# Altium PCB PCB1.PcbDoc (part 10 of 10)
Units mm, origin at the board's own origin, x right, y up, seen from the top; angles counter-clockwise.
Board outline 171.83 x 244.04 mm, 2 copper layers (Top Layer, Bottom Layer); 100 components, 186 nets, 878 pads, 221 vias.
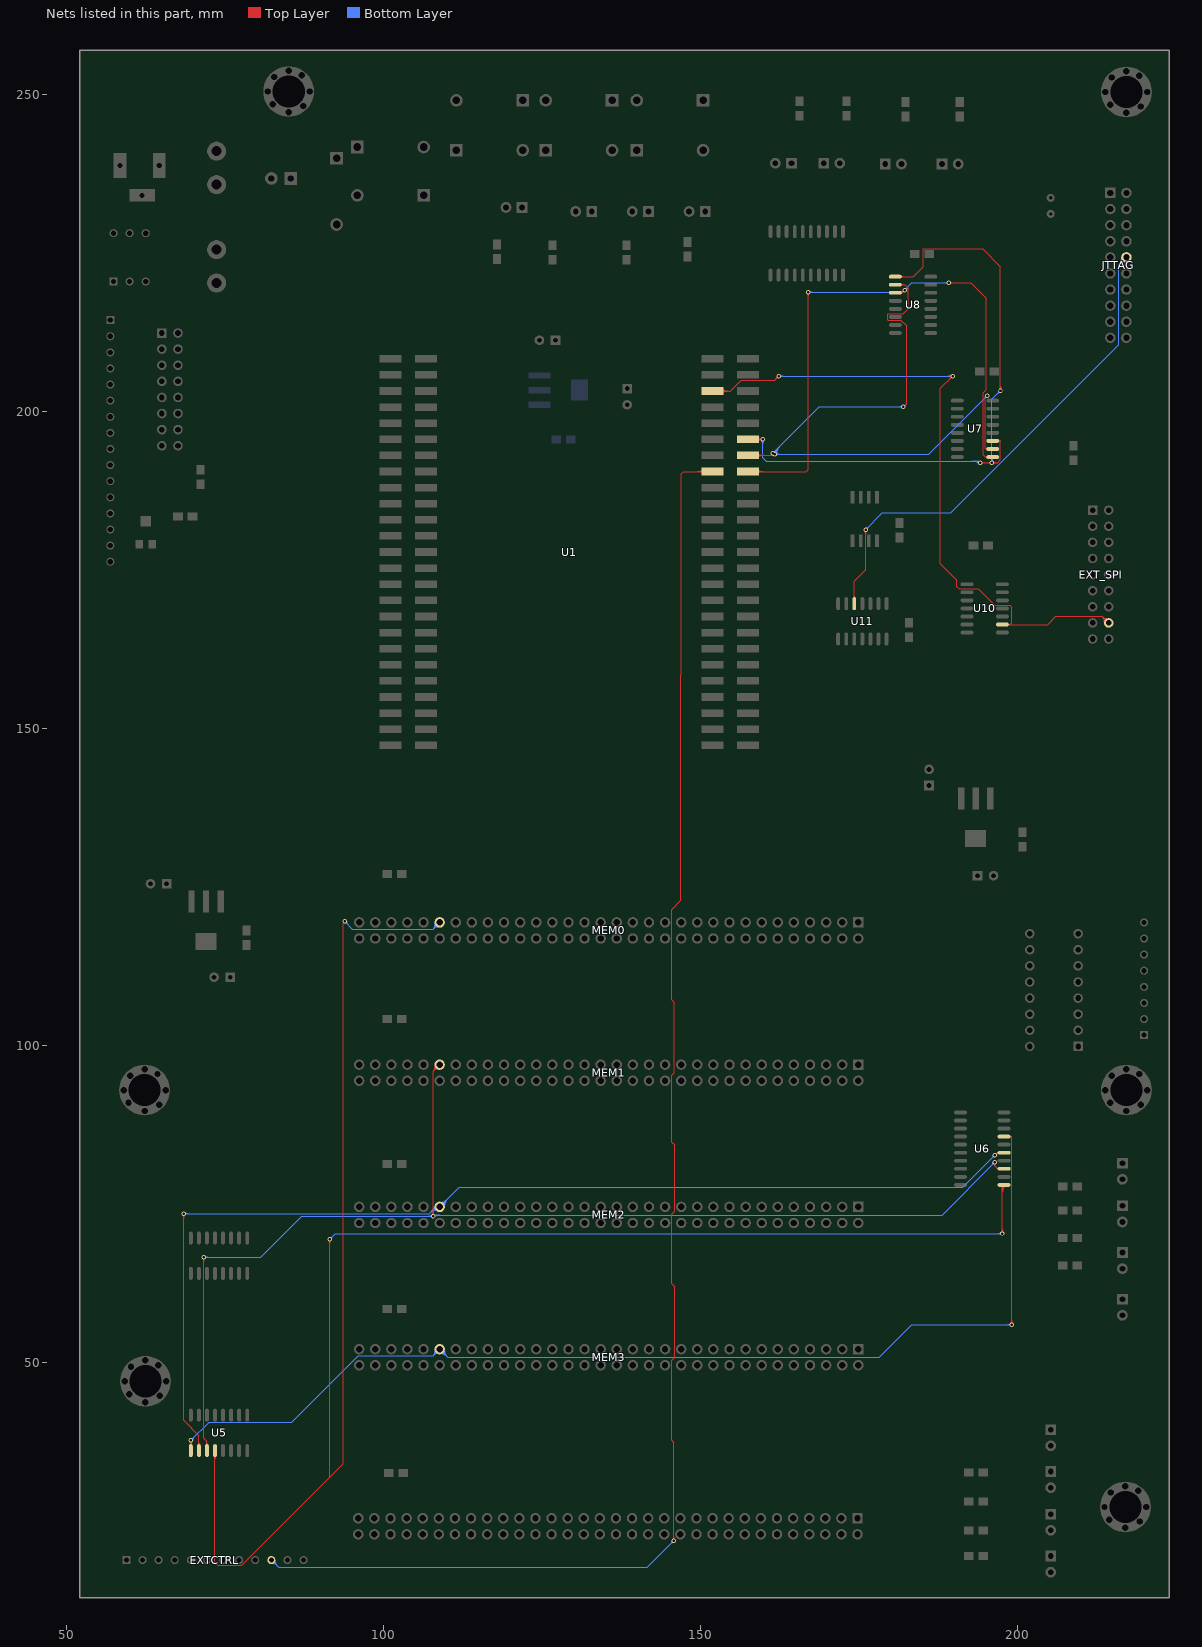
[diagram p10: the nets of this part, all layers, seen from the top]

## Via types
v1: diameter 0.7, hole 0.4, Top Layer to Bottom Layer, 221 vias

## Nets (pads, with @x,y where several pads share a name; then routed paths per layer and width w, separated by ;. In a path a pad name is that pad's centre, name@x,y a point inside that pad or via, vN(x,y) a via of type N, cw(c..) or ccw(c..) an arc to the next point about the centre after c; other vN are vias at no path point) (continued)
RDY0: MEM0.53 U5.4 U6.11 | length 311.6
  Top Layer w0.152: U5.4@73.244,35.195 cw(c72.854,34.805) 73.406,34.805 cw(c73.958,34.805) U5.4@73.568,35.195 ; U5.4@73.406,36.068 73.406,18.415 73.863,17.958 77.597,17.958 91.491,31.852 ; v1@91.297,69.225 cw(c90.83,68.757) 91.491,68.757 cw(c92.152,68.757) v1@91.684,69.225 ; v1(91.491,69.418) 91.491,31.852 ; v1(93.878,119.532) 93.624,119.278 93.624,33.985 91.491,31.852 ; v1@197.418,70.501 ccw(c196.951,70.968) 197.612,70.968 ccw(c198.273,70.968) v1@197.806,70.501 ; v1(197.612,70.307) 197.612,77.978 U6.11@197.866,77.978 ; 197.612,76.813 cw(c199.031,76.813) U6.11@198.028,77.816 ; 197.612,77.181 cw(c198.663,77.181) U6.11@197.92,77.924 ; 197.612,77.549 cw(c198.295,77.549) U6.11@197.812,78.032
  Bottom Layer w0.152: v1(91.491,69.418) 92.38,70.307 v1(197.612,70.307) ; v1@91.491,69.692 ccw(c91.491,70.353) 91.958,69.886 ccw(c92.426,69.418) v1@91.765,69.418 ; v1@93.878,119.259 cw(c93.878,118.598) 94.346,119.065 cw(c94.813,119.532) v1@94.152,119.532 ; v1(93.878,119.532) 95.072,118.339 107.798,118.339 ; MEM0.53@108.099,119.264 cw(c107.038,119.098) 107.798,118.339 ; MEM0.53@108.25,119.288 cw(c107.405,119.155) 108.01,118.551 cw(c108.614,117.946) MEM0.53@108.747,118.791 ; MEM0.53@108.4,119.311 cw(c107.771,119.213) 108.222,118.763 cw(c108.672,118.312) MEM0.53@108.77,118.941 ; MEM0.53@108.723,118.64 ccw(c108.557,117.579) 107.798,118.339 ; MEM0.53@108.839,119.38 107.798,118.339 ; v1@197.418,70.114 ccw(c196.951,69.646) 196.951,70.307 ccw(c196.951,70.968) v1@197.418,70.501
RDY1: MEM1.53 U5.3 U6.13 | length 203.3
  Top Layer w0.152: v1@71.434,66.38 cw(c70.967,65.912) 71.628,65.912 cw(c72.289,65.912) v1@71.822,66.38 ; v1(71.628,66.573) 71.628,38.024 72.136,37.516 U5.3@72.136,36.068 ; U5.3@71.974,36.941 ccw(c71.584,37.331) 72.136,37.331 ccw(c72.688,37.331) U5.3@72.298,36.941 ; v1@107.604,73.244 ccw(c107.137,73.711) 107.798,73.711 ccw(c108.459,73.711) v1@107.991,73.244 ; v1(107.798,73.05) 107.798,95.902 ; MEM1.53@108.099,96.827 cw(c107.038,96.661) 107.798,95.902 ; MEM1.53@108.25,96.851 cw(c107.405,96.719) 108.01,96.114 cw(c108.614,95.509) MEM1.53@108.747,96.354 ; MEM1.53@108.4,96.875 cw(c107.771,96.776) 108.222,96.326 cw(c108.672,95.876) MEM1.53@108.77,96.505 ; MEM1.53@108.723,96.204 ccw(c108.557,95.143) 107.798,95.902 ; MEM1.53@108.839,96.943 107.798,95.902 ; v1@196.221,81.321 cw(c195.933,80.963) 196.393,80.963 ; v1(196.393,81.534) 196.393,80.962 ; 196.552,80.804 ccw(c196.858,81.111) U6.13@197.053,80.722 ; v1@196.564,81.321 ccw(c196.852,80.963) 196.393,80.963 ; 196.701,80.654 ccw(c196.958,80.911) U6.13@197.121,80.586 ; U6.13@196.938,80.446 ccw(c196.837,80.412) 196.837,80.518 ; U6.13@196.938,80.59 cw(c196.837,80.624) 196.837,80.518 ; U6.13@197.866,80.518 196.837,80.518 ; 196.393,80.962 196.837,80.518
  Bottom Layer w0.152: v1(71.628,66.573) 80.594,66.573 87.071,73.05 v1(107.798,73.05) 107.975,73.228 188.087,73.228 v1(196.393,81.534) ; v1@71.822,66.38 cw(c72.289,65.912) 72.289,66.573 cw(c72.289,67.234) v1@71.822,66.767 ; v1@107.604,72.857 ccw(c107.137,72.389) 107.137,73.05 ccw(c107.137,73.711) v1@107.604,73.244 ; v1@107.776,73.072 cw(c108.152,72.696) 108.152,73.228 ; v1@107.883,72.965 cw(c108.52,72.328) 108.52,73.228 ; v1@107.991,72.857 cw(c108.888,71.96) 108.888,73.228 ; v1@196.119,81.534 cw(c195.458,81.534) 195.925,81.067 cw(c196.393,80.599) v1@196.393,81.26
RDY2: MEM2.53 U5.2 U6.15 | length 192.8
  Top Layer w0.152: v1@68.259,73.263 cw(c67.792,72.796) 68.453,72.796 cw(c69.114,72.796) v1@68.647,73.263 ; v1(68.453,73.457) 68.453,40.851 70.866,38.438 U5.2@70.866,36.068 ; U5.2@70.704,36.941 ccw(c70.314,37.331) 70.866,37.331 ccw(c71.418,37.331) U5.2@71.028,36.941 ; v1(196.418,82.652) 196.825,83.058 ; v1@196.447,82.924 ccw(c196.495,83.388) 196.825,83.058 ; v1@196.496,82.729 cw(c197.108,82.117) U6.15@197.151,82.982 ; v1@196.66,82.893 cw(c196.828,82.724) U6.15@196.995,82.895 ; v1@196.691,82.68 cw(c197.154,82.728) 196.825,83.058 ; 196.739,82.972 cw(c197.131,82.58) U6.15@197.159,83.134 ; 196.768,83.002 cw(c196.936,82.834) U6.15@197.101,83.004 ; U6.15@196.941,82.978 ccw(c196.825,82.934) 196.825,83.058 ; U6.15@196.941,83.138 cw(c196.825,83.182) 196.825,83.058 ; U6.15@197.866,83.058 196.825,83.058
  Bottom Layer w0.152: v1(68.453,73.457) 107.213,73.457 108.026,74.27 108.026,74.507 MEM2.53@108.839,74.507 111.929,77.597 191.364,77.597 v1(196.418,82.652) ; v1@68.647,73.263 cw(c69.114,72.796) 69.114,73.457 cw(c69.114,74.118) v1@68.647,73.65 ; 107.14,73.383 cw(c108.476,72.047) MEM2.53@108.752,73.917 ; 107.354,73.598 cw(c108.531,72.421) MEM2.53@108.774,74.067 ; 107.569,73.812 cw(c108.586,72.794) MEM2.53@108.796,74.218 ; 107.783,74.026 cw(c108.642,73.168) MEM2.53@108.819,74.369 ; 107.968,74.211 ccw(c107.672,74.507) MEM2.53@108.09,74.507 ; 107.997,74.241 cw(c108.697,73.541) MEM2.53@108.841,74.52 ; MEM2.53@108.839,74.951 ccw(c108.839,76.023) 109.597,75.265 ccw(c110.355,74.507) MEM2.53@109.283,74.507 ; MEM2.53@108.839,75.103 ccw(c108.839,76.543) 109.857,75.525 ccw(c110.875,74.507) MEM2.53@109.435,74.507 ; MEM2.53@108.839,75.255 ccw(c108.839,77.063) 110.117,75.785 ccw(c111.396,74.507) MEM2.53@109.588,74.507 ; v1@196.144,82.652 cw(c195.483,82.652) 195.951,82.184 cw(c196.418,81.717) v1@196.418,82.378
RDY3: MEM3.53 U5.1 U6.17 | length 187.8
  Top Layer w0.152: v1@69.402,37.479 cw(c68.935,37.012) 69.596,37.012 cw(c70.257,37.012) v1@69.79,37.479 ; U5.1@69.434,36.941 ccw(c69.044,37.331) 69.596,37.331 ccw(c70.148,37.331) U5.1@69.758,36.941 ; U5.1@69.596,36.068 v1(69.596,37.673) ; U6.17@197.866,85.598 199.06,85.598 ; U6.17@198.754,85.453 cw(c199.06,85.203) 199.06,85.598 ; U6.17@198.754,85.743 ccw(c199.06,85.993) 199.06,85.598 ; v1@198.892,56.124 ccw(c198.424,56.592) 199.085,56.592 ccw(c199.746,56.592) v1@199.279,56.124 ; v1(199.085,55.931) 199.085,85.573 199.06,85.598
  Bottom Layer w0.152: v1(69.596,37.673) 72.487,40.564 85.522,40.564 95.987,51.029 107.798,51.029 ; v1@69.596,37.947 ccw(c69.596,38.608) 70.063,38.14 ccw(c70.531,37.673) v1@69.87,37.673 ; MEM3.53@108.099,51.954 cw(c107.038,51.788) 107.798,51.029 ; MEM3.53@108.25,51.978 cw(c107.405,51.845) 108.01,51.241 cw(c108.614,50.636) MEM3.53@108.747,51.481 ; MEM3.53@108.4,52.001 cw(c107.771,51.903) 108.222,51.453 cw(c108.672,51.002) MEM3.53@108.77,51.631 ; MEM3.53@108.723,51.33 ccw(c108.557,50.269) 107.798,51.029 ; MEM3.53@108.842,51.474 cw(c108.848,50.056) 109.85,51.059 cw(c110.853,52.061) MEM3.53@109.435,52.067 ; MEM3.53@108.841,51.626 cw(c108.846,50.571) 109.592,51.317 cw(c110.338,52.063) MEM3.53@109.283,52.068 ; MEM3.53@108.842,51.321 cw(c108.851,49.542) 110.109,50.8 ; MEM3.53@109.588,52.067 ccw(c111.367,52.058) 110.109,50.8 ; v1@198.892,55.737 ccw(c198.424,55.27) 198.424,55.931 ccw(c198.424,56.592) v1@198.892,56.124 ; v1(199.085,55.931) 183.312,55.931 178.181,50.8 110.109,50.8 ; 107.798,51.029 MEM3.53@108.839,52.07 110.109,50.8
RESR0: EXTCTRL.10 U1.15 | length 250.1
  Top Layer w0.152: v1@145.577,22.012 ccw(c145.11,22.48) 145.771,22.48 ccw(c146.432,22.48) v1@145.964,22.012 ; v1(145.771,21.819) 145.771,37.338 145.44,37.668 145.44,50.343 145.898,50.8 145.898,61.951 145.44,62.408 145.44,73.366 145.898,73.824 145.898,84.277 145.44,84.734 145.44,95.25 145.872,95.682 145.872,106.731 145.44,107.163 145.44,121.375 146.906,122.842 146.906,158.375 146.99,158.458 146.99,190.183 147.307,190.5 U1.15@151.892,190.5 ; U1.15@150.372,190.13 ccw(c149.477,189.235) 149.477,190.5 ccw(c149.477,191.765) U1.15@150.372,190.87 ; U1.15@150.479,190.237 ccw(c149.845,189.603) 149.845,190.5 ccw(c149.845,191.397) U1.15@150.479,190.763
  Bottom Layer w0.152: EXTCTRL.10@82.296,18.237 cw(c82.296,16.888) 83.25,17.842 cw(c84.204,18.796) EXTCTRL.10@82.855,18.796 ; EXTCTRL.10@82.296,18.39 cw(c82.296,17.408) 82.99,18.102 cw(c83.684,18.796) EXTCTRL.10@82.702,18.796 ; EXTCTRL.10@82.296,18.796 83.439,17.653 141.605,17.653 v1(145.771,21.819) ; v1@145.497,21.819 cw(c144.836,21.819) 145.303,21.351 cw(c145.771,20.884) v1@145.771,21.545
SCK: EXT_SPI.16 U1.5 U10.9 | length 118.1
  Top Layer w0.152: U1.5@151.892,203.2 154.686,203.2 156.413,204.927 161.722,204.927 v1(162.357,205.562) ; U1.5@153.305,202.937 cw(c153.939,202.303) 153.939,203.2 cw(c153.939,204.097) U1.5@153.305,203.463 ; U1.5@153.412,202.83 cw(c154.307,201.935) 154.307,203.2 cw(c154.307,204.465) U1.5@153.412,203.57 ; v1@162.083,205.562 cw(c161.422,205.562) 161.889,205.095 cw(c162.357,204.627) v1@162.357,205.288 ; v1@189.49,205.562 cw(c188.829,205.562) 189.296,205.095 cw(c189.763,204.627) v1@189.763,205.288 ; v1(189.763,205.562) 187.833,203.632 187.833,175.986 190.436,173.383 190.436,172.364 190.817,171.983 193.802,171.983 196.367,169.418 198.806,169.418 199.111,169.113 199.111,166.675 198.806,166.37 ; U10.9@197.612,166.37 198.806,166.37 ; U10.9@198.5,166.225 cw(c198.806,165.975) 198.806,166.37 ; U10.9@198.5,166.515 ccw(c198.806,166.765) 198.806,166.37 ; EXT_SPI.16@213.703,166.661 ccw(c212.353,166.735) 213.309,167.691 ; EXT_SPI.16@213.855,166.653 ccw(c212.811,166.71) 213.551,167.449 ccw(c214.29,168.189) EXT_SPI.16@214.347,167.145 ; EXT_SPI.16@214.008,166.644 ccw(c213.268,166.685) 213.792,167.208 ccw(c214.315,167.732) EXT_SPI.16@214.356,166.992 ; EXT_SPI.16@214.339,167.297 cw(c214.265,168.647) 213.309,167.691 ; EXT_SPI.16@214.376,166.624 213.309,167.691 ; 198.806,166.37 204.724,166.37 206.045,167.691 213.309,167.691
  Bottom Layer w0.152: v1(162.357,205.562) v1(189.763,205.562) ; v1@162.55,205.369 cw(c163.018,204.901) 163.018,205.562 cw(c163.018,206.223) v1@162.55,205.756 ; v1@189.57,205.369 ccw(c189.102,204.901) 189.102,205.562 ccw(c189.102,206.223) v1@189.57,205.756
SCK_JTTAG: JTTAG.10 U11.5 | length 87.8
  Top Layer w0.152: U11.5@174.082,170.545 ccw(c173.692,170.935) 174.244,170.935 ccw(c174.796,170.935) U11.5@174.406,170.545 ; U11.5@174.244,169.672 174.244,173.203 176.022,174.981 v1(176.022,181.331) ; v1@175.828,181.137 cw(c175.361,180.67) 176.022,180.67 cw(c176.683,180.67) v1@176.216,181.137
  Bottom Layer w0.152: v1(176.022,181.331) 178.658,183.967 189.478,183.967 215.976,210.464 215.976,223.088 ; v1@176.022,181.604 ccw(c176.022,182.265) 176.489,181.798 ccw(c176.957,181.331) v1@176.296,181.331 ; JTTAG.10@216.422,224.245 cw(c214.895,224.169) 215.976,223.088 ; JTTAG.10@216.574,224.252 cw(c215.358,224.192) 216.219,223.331 cw(c217.08,222.47) JTTAG.10@217.14,223.686 ; JTTAG.10@216.727,224.26 cw(c215.821,224.215) 216.462,223.574 cw(c217.103,222.933) JTTAG.10@217.148,223.839 ; JTTAG.10@217.133,223.534 ccw(c217.057,222.007) 215.976,223.088 ; JTTAG.10@217.17,224.282 215.976,223.088
SSEL0: U1.12 U7.11 U8.1 | length 115.8
  Top Layer w0.152: U1.12@157.48,195.58 v1(159.786,195.58) ; U1.12@158.909,195.335 cw(c159.449,194.862) 159.449,195.58 cw(c159.449,196.298) U1.12@158.909,195.825 ; U1.12@159.024,195.235 cw(c159.786,194.567) v1(159.786,195.58) ; U1.12@159.024,195.925 ccw(c159.786,196.593) v1(159.786,195.58) ; v1@159.592,195.386 ccw(c159.125,194.919) 159.125,195.58 ccw(c159.125,196.241) v1@159.592,195.774 ; U8.1@180.721,221.234 183.515,221.234 185.09,222.809 185.09,225.603 185.115,225.628 194.513,225.628 197.307,222.834 v1(197.307,203.251) ; U8.1@181.594,221.072 cw(c181.984,220.682) 181.984,221.234 cw(c181.984,221.786) U8.1@181.594,221.396 ; v1(194.107,191.872) v1(195.961,191.872) 196.85,191.872 197.307,192.329 197.307,195.301 197.282,195.326 ; v1@194.3,191.678 cw(c194.768,191.211) 194.768,191.872 cw(c194.768,192.533) v1@194.3,192.065 ; v1@195.767,191.678 ccw(c195.3,191.211) 195.3,191.872 ccw(c195.3,192.533) v1@195.767,192.065 ; U7.11@196.088,195.326 197.282,195.326 ; v1@196.155,191.678 cw(c196.622,191.211) 196.622,191.872 cw(c196.622,192.533) v1@196.155,192.065 ; U7.11@196.976,195.181 cw(c197.282,194.931) 197.282,195.326 ; U7.11@196.976,195.471 ccw(c197.282,195.721) 197.282,195.326 ; v1@197.114,203.444 ccw(c196.646,203.912) 197.307,203.912 ccw(c197.968,203.912) v1@197.501,203.444
  Bottom Layer w0.152: v1@159.592,195.386 cw(c159.125,194.919) 159.786,194.919 cw(c160.447,194.919) v1@159.979,195.386 ; v1(159.786,195.58) 159.786,192.684 160.338,192.132 193.846,192.132 v1(194.107,191.872) ; 192.817,192.132 cw(c192.817,190.582) v1@193.913,191.678 ; 193.185,192.132 cw(c193.185,190.95) v1@194.021,191.786 ; 193.553,192.132 cw(c193.553,191.318) v1@194.129,191.894 ; v1@195.767,192.065 ccw(c195.3,192.533) 195.961,192.533 ccw(c196.622,192.533) v1@196.155,192.065 ; v1(195.961,191.872) 195.961,201.905 v1(197.307,203.251) ; v1@197.033,203.251 cw(c196.372,203.251) 196.84,202.783 cw(c197.307,202.316) v1@197.307,202.977
SSEL1: U1.14 U7.10 U8.2 | length 120.3
  Top Layer w0.152: U1.14@157.48,193.04 161.087,193.04 ; U1.14@158.893,192.777 cw(c159.527,192.143) 159.527,193.04 cw(c159.527,193.937) U1.14@158.893,193.303 ; U1.14@159,192.67 cw(c159.895,191.775) 159.895,193.04 cw(c159.895,194.305) U1.14@159,193.41 ; v1@161.166,193.119 cw(c161.53,192.755) v1@161.734,193.227 ; v1@161.311,193.04 ccw(c161.311,193.361) v1@161.609,193.243 ; v1@161.324,193.277 cw(c161.625,192.976) v1@161.795,193.367 ; v1(161.404,193.357) 161.087,193.04 ; v1@161.467,193.299 cw(c161.087,193.449) 161.087,193.04 ; v1(161.722,193.199) 161.642,193.119 161.563,193.04 161.404,193.04 161.087,193.04 ; U8.2@180.721,219.964 182.245,219.964 182.778,219.431 182.778,216.179 181.991,215.392 179.527,215.392 179.502,215.367 179.502,214.401 179.527,214.376 181.61,214.376 182.499,213.487 182.499,201.219 v1(181.966,200.685) ; U8.2@181.594,219.802 cw(c181.984,219.412) 181.984,219.964 cw(c181.984,220.516) U8.2@181.594,220.126 ; v1@181.966,200.959 ccw(c181.966,201.62) 182.433,201.153 ccw(c182.9,200.685) v1@182.239,200.685 ; v1@194.957,202.406 cw(c194.639,202.338) 194.869,202.108 ; v1@195.167,202.196 ccw(c195.099,201.878) 194.869,202.108 ; U7.10@195.2,193.911 ccw(c194.894,193.661) 194.894,194.056 ; U7.10@195.2,194.201 cw(c194.894,194.451) 194.894,194.056 ; v1(195.224,202.463) 194.869,202.108 ; U7.10@196.088,194.056 194.894,194.056 ; 194.869,202.108 194.869,194.081 194.894,194.056
  Bottom Layer w0.152: v1(161.404,193.357) 161.484,193.437 168.732,200.685 v1(181.966,200.685) ; v1@161.404,193.631 ccw(c161.404,194.292) 161.872,193.825 ccw(c162.339,193.357) v1@161.678,193.357 ; v1@161.49,193.443 ccw(c162.081,194.034) 162.081,193.199 ; v1@161.538,193.199 cw(c162.245,193.199) 161.745,193.699 ; v1@161.598,193.551 ccw(c162.449,194.402) 162.449,193.199 ; v1@161.691,193.199 cw(c162.766,193.199) 162.006,193.959 ; v1(161.722,193.199) 185.96,193.199 v1(195.224,202.463) ; v1@161.843,193.199 cw(c163.286,193.199) 162.266,194.219 ; v1@161.915,193.005 cw(c162.383,192.538) 162.383,193.199 cw(c162.383,193.86) v1@161.915,193.392 ; v1@161.996,193.199 cw(c163.806,193.199) 162.526,194.479 ; v1@181.772,200.492 ccw(c181.305,200.024) 181.305,200.685 ccw(c181.305,201.346) v1@181.772,200.879 ; v1@194.951,202.463 cw(c194.29,202.463) 194.757,201.996 cw(c195.224,201.529) v1@195.224,202.19
SSEL2: U1.16 U7.9 U8.3 | length 107.8
  Top Layer w0.152: U1.16@157.48,190.5 166.637,190.5 166.954,190.817 v1(166.954,218.808) ; U1.16@158.893,190.237 cw(c159.527,189.603) 159.527,190.5 cw(c159.527,191.397) U1.16@158.893,190.763 ; U1.16@159,190.13 cw(c159.895,189.235) 159.895,190.5 cw(c159.895,191.765) U1.16@159,190.87 ; v1@166.761,218.615 cw(c166.293,218.147) 166.954,218.147 cw(c167.615,218.147) v1@167.148,218.615 ; U8.3@180.721,218.694 181.788,218.694 ; U8.3@181.415,218.62 ccw(c181.517,219.054) 181.833,218.739 ; U8.3@181.45,218.768 ccw(c181.591,219.368) v1@182.026,218.932 ; U8.3@181.484,218.917 ccw(c181.664,219.681) v1(182.22,219.126) 181.788,218.694 ; U8.3@181.64,218.599 cw(c181.788,218.532) 181.788,218.694 ; U8.3@181.64,218.789 ccw(c181.788,218.856) 181.788,218.694 ; v1@181.946,219.11 cw(c181.403,219.079) 181.788,218.694 ; v1@182.204,218.852 ccw(c182.172,218.309) 181.788,218.694 ; v1(189.179,220.243) 192.634,220.243 195.021,217.856 195.021,203.378 194.589,202.946 194.589,193.142 194.945,192.786 ; v1@189.373,220.05 cw(c189.84,219.582) 189.84,220.243 cw(c189.84,220.904) v1@189.373,220.437 ; U7.9@195.188,192.657 ccw(c194.945,192.493) 194.945,192.786 ; U7.9@195.188,192.915 cw(c194.945,193.079) 194.945,192.786 ; U7.9@196.088,192.786 194.945,192.786
  Bottom Layer w0.152: v1(166.954,218.808) 181.902,218.808 v1(182.22,219.126) 183.337,220.243 v1(189.179,220.243) ; v1@167.148,218.615 cw(c167.615,218.147) 167.615,218.808 cw(c167.615,219.469) v1@167.148,219.002 ; v1@182.22,219.4 ccw(c182.22,220.061) 182.687,219.593 ccw(c183.154,219.126) v1@182.493,219.126 ; v1@188.986,220.05 ccw(c188.518,219.582) 188.518,220.243 ccw(c188.518,220.904) v1@188.986,220.437
pads on no net: EXT.39 EXT.53 EXTCTRL.11 EXTCTRL.12 JTTAG.3 JTTAG.5 JTTAG.7 JTTAG.9 JTTAG.11 JTTAG.12 JTTAG.13 JTTAG.14 JTTAG.15 JTTAG.16 JTTAG.17 JTTAG.18 JTTAG.20 S0.2 S0.3 S0.4 S0.5 U1.2 U1.52 U5.6 U7.6 U10.11 U10.12 U10.13 U11.8 U11.9 U11.10 U11.11 U11.12 U11.13

## Polygon pours and split planes (outlines as drawn)
GND on Top Layer "Top Layer-No Net" (solid, remove dead copper, pour order 1000): 212.598,34.036 222.377,34.036 222.377,20.701 222.25,20.828 212.725,20.828 212.725,33.909 212.598,34.036
GND on Top Layer "Top Layer-No Net" (solid, remove dead copper, pour order 1001): 208.903,242.608 208.903,254.877 209.042,255.016 209.931,255.905 221.869,255.905 221.869,242.951 221.488,242.57 221.318,242.74 209.035,242.74
GND on Top Layer "Top Layer-No Net" (solid, pour order 1002): 73.152,247.269 73.152,243.713 78.232,243.713 78.359,243.84 78.359,241.427 89.535,241.427 89.662,241.554 96.52,248.412 96.52,255.651 73.152,255.651 73.152,247.269
GND on Top Layer "Top Layer-No Net" (solid, pour order 1003): 96.012,255.651 96.012,252.96 209.447,252.96 209.528,252.88 210.566,253.907 210.566,255.905 96.269,255.905 96.012,255.651
GND on Top Layer "Top Layer-No Net" (solid, remove dead copper, pour order 1004): 53.721,101.981 69.215,101.981 69.088,101.854 69.088,86.614 56.515,86.614 55.88,87.249 54.991,86.36 54.991,50.419 56.134,50.419 57.912,52.197 58.674,52.959 66.294,52.959 66.294,52.705 66.929,52.07 67.183,51.816 67.183,43.434 64.897,41.148 64.77,41.275 55.118,41.275 55.118,15.748 55.245,15.621 56.134,14.732 204.089,14.732 208.915,14.732 211.074,16.891 210.947,17.018 210.947,36.83 210.947,35.687 212.715,33.919 212.725,33.909 212.725,20.867 212.725,15.621 212.09,14.986 210.693,13.589 201.295,13.589 53.34,13.589 53.34,101.981 53.721,101.981
GND on Top Layer "Top Layer-No Net" (solid, pour order 1005): 222.377,21.102 222.377,15.293 220.803,13.72 220.672,13.589 210.312,13.589 210.312,14.9 211.492,16.08 211.099,16.473 211.099,21.717 221.624,21.717 222.28,21.062
GND on Top Layer "Top Layer-No Net" (solid, pour order 1006): 210.947,35.607 216.535,41.495 216.535,48.895 219.837,48.895 220.345,48.36 222.377,46.219 222.377,33.909 210.947,33.909
GND on Top Layer "Top Layer-No Net" (solid, pour order 1007): 210.693,96.52 212.974,96.52 214.879,98.425 215.133,98.679 221.361,98.679 222.631,97.409 222.377,97.155 222.377,45.593 219.583,48.387 216.535,48.387 216.535,82.931 213.487,85.979 210.693,88.773 210.693,96.52

## Keep-outs
Keep-Out Layer:
  the board outline again, w0.254

## Silkscreen, mask and mechanical layers (free items; w line width, h text height)
Top Overlay:
  text "5V Only!!!" at 56.261,249.301 h1.52
  text "MISO1" at 222.631,185.42 h1.52 r180
  text "CS1" at 209.677,185.166 h1.52 r180
  text "MISO2" at 223.139,182.88 h1.52 r180
  text "CS2" at 209.677,182.642 h1.52 r180
  text "MISO3" at 223.139,180.34 h1.52 r180
  text "CS3" at 209.677,180.118 h1.52 r180
  text "MISO4" at 223.139,178.054 h1.52 r180
  text "CS4" at 209.677,177.594 h1.52 r180
  text "MISO5" at 223.139,175.514 h1.52 r180
  text "CS5" at 209.677,175.07 h1.52 r180
  text "MISO6" at 223.139,172.745 h1.52 r180
  text "CS6" at 209.677,172.545 h1.52 r180
  text "MISO7" at 223.139,170.18 h1.52 r180
  text "CS7" at 209.677,170.021 h1.52 r180
  text "SCK" at 220.345,167.513 h1.52 r180
  text "MOSI" at 209.677,167.497 h1.52 r180
  text "GND" at 220.346,165.1 h1.52 r180
  text "3V3" at 209.677,164.973 h1.52 r180
  text "Code Name" at 136.779,60.198 h5
  text "Model Name" at 186.69,39.878 h1.52 r90
  text "Version" at 189.23,39.878 h1.52 r90
  text "S/N CODE" at 198.374,39.751 h1.52 r90

## Text inside footprints (layer, text, board x,y; h text height)
EXT: Top Overlay "63" at 94.812,26.15 h1.5 r180; Top Overlay "64" at 94.812,23.61 h1.5 r180; Top Overlay "1" at 176.452,26.15 h1.5 r180; Top Overlay "2" at 176.952,23.61 h1.5 r180
EXT_SPI: Top Overlay "18" at 213.868,162.052 h1.27 r270; Top Overlay "17" at 211.328,162.052 h1.27 r270; Top Overlay "1" at 211.328,186.944 h1.27 r270; Top Overlay "2" at 213.868,187.452 h1.27 r270
GPIO: Top Overlay "16" at 67.056,193.04 h1.27 r270; Top Overlay "15" at 64.516,193.04 h1.27 r270; Top Overlay "1" at 64.516,214.884 h1.27 r270; Top Overlay "2" at 67.056,214.884 h1.27 r270
JTTAG: Top Overlay "19" at 213.88,210.382 h1.5 r270; Top Overlay "20" at 216.42,210.382 h1.5 r270; Top Overlay "1" at 213.88,236.142 h1.5 r270; Top Overlay "2" at 216.42,236.642 h1.5 r270
MEM0: Top Overlay "63" at 94.939,120.13 h1.5 r180; Top Overlay "64" at 94.939,117.59 h1.5 r180; Top Overlay "1" at 176.579,120.13 h1.5 r180; Top Overlay "2" at 177.079,117.59 h1.5 r180
MEM1: Top Overlay "63" at 94.939,97.693 h1.5 r180; Top Overlay "64" at 94.939,95.153 h1.5 r180; Top Overlay "1" at 176.579,97.693 h1.5 r180; Top Overlay "2" at 177.079,95.153 h1.5 r180
MEM2: Top Overlay "63" at 94.939,75.257 h1.5 r180; Top Overlay "64" at 94.939,72.717 h1.5 r180; Top Overlay "1" at 176.579,75.257 h1.5 r180; Top Overlay "2" at 177.079,72.717 h1.5 r180
MEM3: Top Overlay "63" at 94.939,52.82 h1.5 r180; Top Overlay "64" at 94.939,50.28 h1.5 r180; Top Overlay "1" at 176.579,52.82 h1.5 r180; Top Overlay "2" at 177.079,50.28 h1.5 r180
U1: Top Overlay "2" at 155.206,211.135 h1.5 r270; Top Overlay "1" at 152.666,210.635 h1.5 r270; Top Overlay "50" at 155.206,145.465 h1.5 r270; Top Overlay "49" at 152.666,145.465 h1.5 r270; Top Overlay "52" at 104.406,212.404 h1.5 r270; Top Overlay "100" at 104.406,145.465 h1.5 r270; Top Overlay "99" at 101.866,145.465 h1.5 r270; Top Overlay "51" at 101.866,212.404 h1.5 r270